# Altium PCB LEDFLX.PcbDoc (part 1 of 2)
Units mil, origin at the board's own origin, x right, y up, seen from the top; angles counter-clockwise.
Board outline 11984.7 x 6871.18 mil, 2 copper layers (Top Layer, Bottom Layer); 47 components, 41 nets, 211 pads, 221 vias.
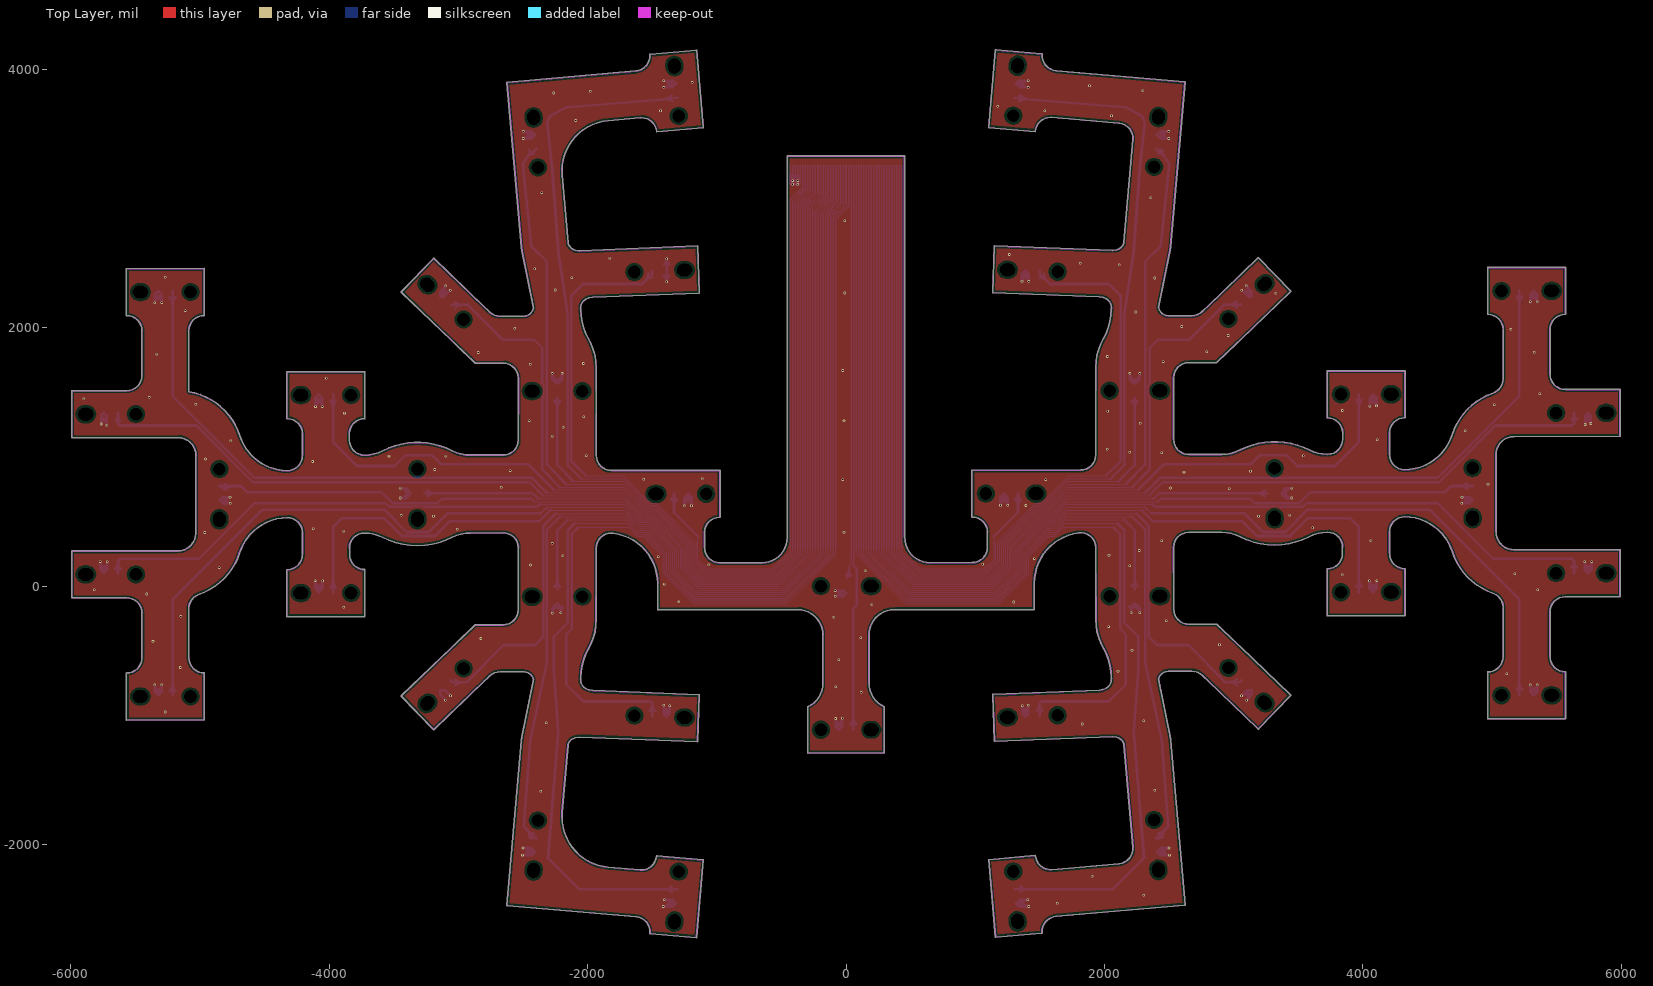
[diagram p0: Top Layer view]
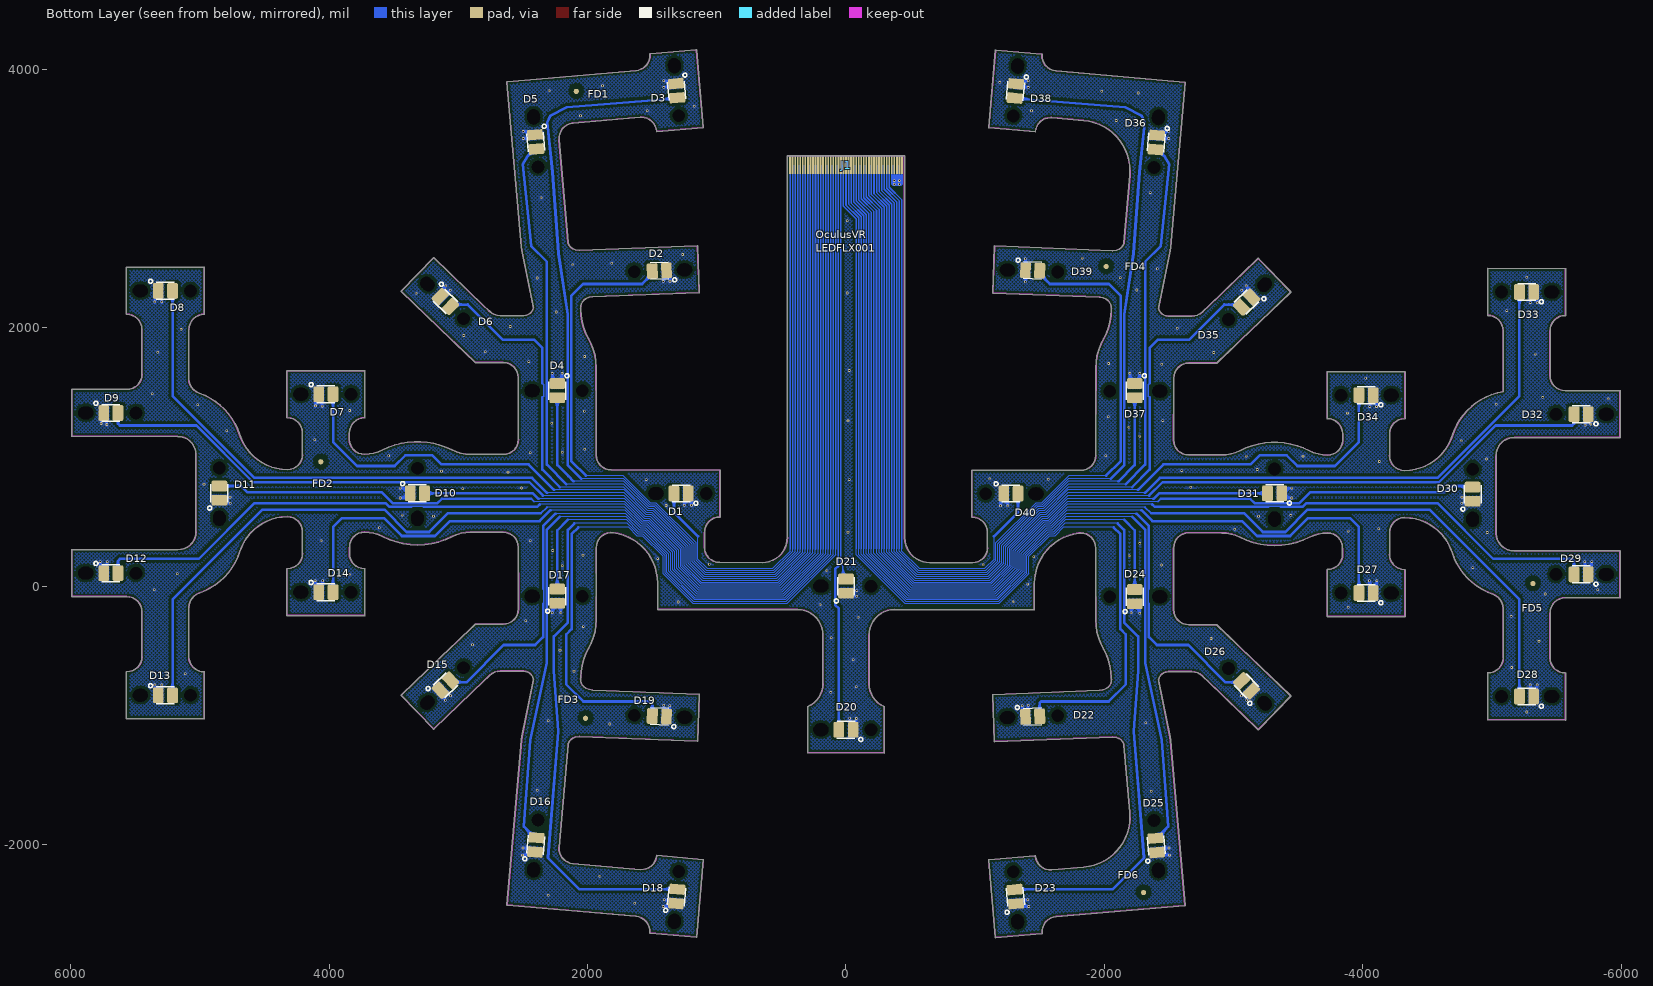
[diagram p1: Bottom Layer view, seen from below]

## Layer stack, top to bottom
Top Layer: signal copper 1.4
Dielectric: dielectric 12.6, FR-4, Dk 4.8
Bottom Layer: signal copper 1.4

## Board outline
1917 vertices, not listed, extent -5992.35,-2719.92 5992.35,4151.26

## Design rules (kind name [scope] priority, off if disabled: settings)
AssemblyTestpoint [All] p1: testpointundercomponent=TRUE minsize=30 maxsize=100 preferedsize=60 minholesize=0 maxholesize=40 preferedholesize=32 testpointgrid=1 usegrid=TRUE gridtolerance=0.01 allowsidetop=TRUE allowsidebottom=TRUE
Clearance Fiducial [HasFootprint('FIDUCIAL')] p1: gap=40
Clearance PolyToBoardOutline [InPolygon vs (OnLayer('Keep-Out Layer'))] p2: gap=15
Clearance PolyToPoly [InPolygon vs InPolygon] p3: gap=20
Clearance PolyToVia [InPolygon vs IsVia] p4: gap=20
Clearance PolyToTrace [InPolygon vs IsTrack] p5: gap=20
Clearance PolyToPad [InPolygon vs IsPad] p6: gap=20
Clearance PadToPad [IsPad vs IsPad] p7: gap=5
Clearance PadToVia [IsPad vs IsVia] p8: gap=4
Clearance [All] p9: gap=6
ComponentClearance [All] p1: gap=20 collisioncheckmode=3 verticalgap=10 showdistances=FALSE
FabricationTestpoint [All] p1: side=3 testpointundercomponent=TRUE minsize=30 maxsize=100 preferedsize=60 minholesize=0 maxholesize=40 preferedholesize=32 testpointgrid=1 allowsidetop=TRUE allowsidebottom=TRUE usegrid=TRUE gridtolerance=0.01
HoleSize [All] p1: absolutevalues=TRUE maxlimit=250 minlimit=10 maxpercent=80.000 minpercent=20.000
MinimumAnnularRing [All] p1: minimumring=5
MinimumSolderMaskSliver [All] p1: minsoldermaskwidth=4
PlaneClearance [All] p1: clearance=13
PlaneConnect [All] p1: planeconnectstyle=Direct reliefexpansion=10 reliefentries=4 reliefconductorwidth=10 reliefairgap=10
PolygonConnect [All] p1: connectstyle=Direct reliefconductorwidth=15 reliefentries=4 polygonreliefangle="90 Angle" airgapwidth=10
RoutingVias [All] p1: holewidth=10 width=32 viastyle="Through Hole" minholewidth=10 minwidth=20 maxholewidth=250 maxwidth=250
SilkToSilkClearance [All] p1: silktosilkclearance=0
SilkToSolderMaskClearance [IsPad] p1: minsilkscreentomaskgap=5 clearancetoexposedcopper=TRUE
SolderMaskExpansion [All] p1: expansion=4
Width [All] p1: maxlimit=50 minlimit=5 preferedwidth=10
19 further rules are at their usual default settings.

## Components (designator, comment, footprint, x,y, rotation, side; value= is the part's Value field where it differs from the comment)
D1 "LED" VISHAY_PLCC2_A 1276.42,716.73 r0 bottom locked
D2 "LED" VISHAY_PLCC2_A 1443.9,2441.14 r357.76 bottom locked
D3 "LED" VISHAY_PLCC2_A 1311.22,3834.88 r264.99 bottom locked
D4 "LED" VISHAY_PLCC2_A 2234.72,1512.95 r270 bottom locked
D5 "LED" VISHAY_PLCC2_A 2401.1,3438.19 r265.05 bottom locked
D6 "LED" VISHAY_PLCC2_A 3100.28,2203.46 r223.86 bottom locked
D7 "LED" VISHAY_PLCC2_A 4025.35,1484.92 r180 bottom locked
D8 "LED" VISHAY_PLCC2_A 5267.68,2285.35 r180 bottom locked
D9 "LED" VISHAY_PLCC2_A 5690.2,1340.35 r180 bottom locked
D10 "LED" VISHAY_PLCC2_A 3317.32,718.43 r180 bottom locked
D11 "LED" VISHAY_PLCC2_A 4850.2,719.72 r90 bottom locked
D12 "LED" VISHAY_PLCC2_A 5690.2,100.47 r180 bottom locked
D13 "LED" VISHAY_PLCC2_A 5267.68,-845.24 r180 bottom locked
D14 "LED" VISHAY_PLCC2_A 4025.35,-46.85 r180 bottom locked
D15 "LED" VISHAY_PLCC2_A 3100.28,-766.97 r136.14 bottom locked
D16 "LED" VISHAY_PLCC2_A 2401.1,-2002.83 r94.95 bottom locked
D17 "LED" VISHAY_PLCC2_A 2234.72,-77.91 r90 bottom locked
D18 "LED" VISHAY_PLCC2_A 1311.22,-2401.34 r95.01 bottom locked
D19 "LED" VISHAY_PLCC2_A 1443.9,-1007.4 r2.24 bottom locked
D20 "LED" VISHAY_PLCC2_A 0,-1111.77 r0 bottom locked
D21 "LED" VISHAY_PLCC2_A 0,0 r90 bottom locked
D22 "LED" VISHAY_PLCC2_A -1443.9,-1009.8 r177.76 bottom locked
D23 "LED" VISHAY_PLCC2_A -1311.22,-2403.54 r84.99 bottom locked
D24 "LED" VISHAY_PLCC2_A -2234.72,-81.61 r90 bottom locked
D25 "LED" VISHAY_PLCC2_A -2401.1,-2006.85 r85.05 bottom locked
D26 "LED" VISHAY_PLCC2_A -3100.28,-772.13 r46.14 bottom locked
D27 "LED" VISHAY_PLCC2_A -4025.35,-53.54 r0 bottom locked
D28 "LED" VISHAY_PLCC2_A -5267.68,-854.02 r0 bottom locked
D29 "LED" VISHAY_PLCC2_A -5690.2,90.98 r0 bottom locked
D30 "LED" VISHAY_PLCC2_A -4850.2,711.65 r90 bottom locked
D31 "LED" VISHAY_PLCC2_A -3317.32,718.43 r0 bottom locked
D32 "LED" VISHAY_PLCC2_A -5690.2,1330.87 r0 bottom locked
D33 "LED" VISHAY_PLCC2_A -5267.68,2276.57 r0 bottom locked
D34 "LED" VISHAY_PLCC2_A -4025.35,1478.19 r0 bottom locked
D35 "LED" VISHAY_PLCC2_A -3100.28,2198.31 r316.14 bottom locked
D36 "LED" VISHAY_PLCC2_A -2401.1,3434.17 r274.95 bottom locked
D37 "LED" VISHAY_PLCC2_A -2234.72,1512.95 r270 bottom locked
D38 "LED" VISHAY_PLCC2_A -1311.22,3832.68 r275.01 bottom locked
D39 "LED" VISHAY_PLCC2_A -1443.9,2443.9 r182.24 bottom locked
D40 "LED" VISHAY_PLCC2_A -1276.42,716.73 r180 bottom locked
FD1 "FIDUCIAL" FIDUCIAL 2087.7,3829.72 r180 bottom
FD2 "FIDUCIAL" FIDUCIAL 4064.96,962.15 r180 bottom
FD3 "FIDUCIAL" FIDUCIAL 2015.75,-1022.64 r180 bottom
FD4 "FIDUCIAL" FIDUCIAL -2013.78,2474.41 r180 bottom
FD5 "FIDUCIAL" FIDUCIAL -5316.93,19.69 r180 bottom
FD6 "FIDUCIAL" FIDUCIAL -2303.15,-2372.05 r180 bottom
J1 "62684-FPC" FCI_62684-FLEX_SIDE -0.08,3258.66 r180 bottom locked

## Footprints (in the part's own frame and the unit in brackets; to place one, negate y for a bottom-side part, rotate by r counter-clockwise, add the part's x,y. Pads: shape width x height; smd on the part's side, far side on the other; paste and mask are expansions set on the pad)
FCI_62684-FLEX_SIDE [mm]
  rect 0.35x3.5 smd paste+0 mask+0: 1(-11,0) 2(-10.5,0) 3(-10,0) 4(-9.5,0) 5(-9,0) 6(-8.5,0) 7(-8,0) 8(-7.5,0) 9(-7,0) 10(-6.5,0) 11(-6,0) 12(-5.5,0) 13(-5,0) 14(-4.5,0) 15(-4,0) 16(-3.5,0) 17(-3,0) 18(-2.5,0) 19(-2,0) 20(-1.5,0) 21(-1,0) 22(-0.5,0) 23(0,0) 24(0.5,0) 25(1,0) 26(1.5,0) 27(2,0) 28(2.5,0) 29(3,0) 30(3.5,0) 31(4,0) 32(4.5,0) 33(5,0) 34(5.5,0) 35(6,0) 36(6.5,0) 37(7,0) 38(7.5,0) 39(8,0) 40(8.5,0) 41(9,0) 42(9.5,0) 43(10,0) 44(10.5,0) 45(11,0)
FIDUCIAL [mil]
  round 40 smd paste-20 mask+20: 1(0,0)
  body extent -40,-40 40,40
VISHAY_PLCC2_A [mm]
  rrect30% 2.108x3.108 smd mask-0.254: 1(-1.4,0) 2(1.4,0)
  silkscreen extent -3.32,-1.65 1.78,2.31

## Part data
J1: library part FCI_62684-FLEX

## Free pads (board coordinates)
  round 0 hole 98.43 slot 118.11 at 0 deg: 1(-5884.45,90.83) 1(-5884.45,1330.72) 1(-5461.93,-854.16) 1(-5461.93,2276.42) 1(-4219.6,-53.72) 1(-4219.6,1478.05) 1(-2428.97,-81.78) 1(-2428.97,1509.08) 1(-1470.67,714.45) 1(194.24,-1111.61) 1(194.24,0.16) 1(1470.67,716.9) 1(2428.97,-77.74) 1(2428.97,1513.13) 1(4219.59,-46.7) 1(4219.59,1485.07) 1(5461.93,-845.07) 1(5461.93,2285.51) 1(5884.45,100.62) 1(5884.45,1340.51)
  round 0 hole 98.43: 1(-5495.96,91.15) 1(-5495.96,1331.04) 1(-5073.44,-853.84) 1(-5073.44,2276.74) 1(-4850.21,905.78) 1(-3831.1,-53.4) 1(-3831.1,1478.37) 1(-3317.32,907.06) 1(-2960.33,-637.4) 1(-2960.33,2063.82) 1(-2384.17,-1813.42) 1(-2384.17,3240.79) 1(-2040.48,-81.46) 1(-2040.48,1509.41) 1(-1637.98,-1002.38) 1(-1637.98,2431) 1(-1294.28,-2210.11) 1(-1294.28,3639.3) 1(-1082.18,714.77) 1(-194.25,-1111.93) 1(-194.25,-0.16) 1(1082.18,716.57) 1(1294.27,-2207.95) 1(1294.27,3641.45) 1(1637.98,-999.66) 1(1637.98,2433.73) 1(2040.48,-78.06) 1(2040.48,1512.8) 1(2384.17,-1809.45) 1(2384.17,3244.76) 1(2960.32,-632.47) 1(2960.32,2068.74) 1(3317.32,912.58) 1(3831.1,-47.02) 1(3831.1,1484.75) 1(4850.21,913.86) 1(5073.43,-845.4) 1(5073.43,2285.19) 1(5495.96,100.3) 1(5495.96,1340.19)
  round 0 hole 98.43 slot 118.11 at 90 deg: 1(-4850.21,517.49) 1(-3317.32,518.76) 1(3317.32,524.29) 1(4850.21,525.56)
  round 0 hole 98.43 slot 118.11 at 46.14 deg: 1(-3240.25,-906.88)
  round 0 hole 98.43 slot 118.11 at 136.14 deg: 1(-3240.25,2332.83) 1(3240.25,-901.48)
  round 0 hole 98.43 slot 118.11 at 85.05 deg: 1(-2418.05,-2200.26) 1(2418.05,3631.6)
  round 0 hole 98.43 slot 118.11 at 94.95 deg: 1(-2418.05,3627.58) 1(2418.05,-2196.24)
  round 0 hole 98.43 slot 118.11 at 84.99 deg: 1(-1328.16,-2596.95) 1(1328.16,4028.29)
  round 0 hole 98.43 slot 118.11 at 95.01 deg: 1(-1328.16,4026.08) 1(1328.16,-2594.74)
  round 0 hole 98.43 slot 118.11 at 177.76 deg: 1(-1249.79,-1017.23) 1(1249.79,2448.58)
  round 0 hole 98.43 slot 118.11 at 2.24 deg: 1(-1249.79,2446.5) 1(1249.79,-1015.15)
  round 0 hole 98.43 slot 118.11 at 43.86 deg: 1(3240.25,2338.22)

## Via types
v1: diameter 20, hole 10, Top Layer to Bottom Layer, 221 vias

## Nets (pads, with @x,y where several pads share a name; then routed paths per layer and width w, separated by ;. In a path a pad name is that pad's centre, name@x,y a point inside that pad or via, vN(x,y) a via of type N, cw(c..) or ccw(c..) an arc to the next point about the centre after c; other vN are vias at no path point)
LED_0: D1.2 J1.1 | length 4614.2
  Bottom Layer w8: 432.99,287.4 432.99,270.75 570.87,132.87 1071.85,132.87 1145.67,206.69 1145.67,384.84
  Bottom Layer w12: 432.99,287.4 J1.1@432.99,3258.66
  Bottom Layer w20: 1145.67,384.84 1331.54,570.71 D1.2@1331.54,716.73 ; 1331.54,621.01 cw(c1407.57,621.01) 1353.81,674.78 ccw(c1407.57,621.01) 1331.54,621.01 ; 1331.54,621.01 ccw(c1255.5,621.01) 1309.26,674.78 cw(c1255.5,621.01) 1331.54,621.01
LED_1: D2.2 J1.2 | length 7433.1
  Bottom Layer w8: 413.31,287.4 413.31,269.22 564.65,117.87 1078.06,117.87 1160.67,200.48 1160.67,335.27 1468.08,642.68 1509.8,642.68 1722.44,855.31 2013.78,855.31
  Bottom Layer w12: 413.31,287.4 J1.2@413.31,3258.66
  Bottom Layer w20: D2.2@1498.97,2438.99 1498.97,2417.37 1577.76,2338.58 2035.43,2338.58 2125,2249.02 2125,966.54 2013.78,855.31 ; D2.2@1498.2,2387.82 cw(c1498.2,2314.64) 1549.95,2366.39 ccw(c1498.2,2314.64) D2.2@1498.2,2387.82 ; D2.2@1529.7,2419.32 ccw(c1608.59,2419.32) 1552.81,2363.53 cw(c1608.59,2419.32) D2.2@1529.7,2419.32
LED_2: D3.2 J1.3 | length 9163.9
  Bottom Layer w8: 393.62,287.4 393.62,267.69 558.44,102.87 1084.28,102.87 1175.67,194.27 1175.67,329.06 1474.29,627.68 1516.02,627.68 1721.02,832.68 2050.2,832.68
  Bottom Layer w12: 393.62,287.4 J1.3@393.62,3258.66
  Bottom Layer w20: D3.2@1306.41,3779.97 1439.96,3765.75 2162.4,3706.69 2289.37,3639.76 2311.02,3588.58 2271.65,3205.71 2225.39,2575.79 2152.56,2101.38 2152.56,935.04 2050.2,832.68 ; D3.2@1339.52,3761.53 cw(c1371.34,3722.13) 1376.7,3772.49 ; D3.2@1342.74,3791.76 ccw(c1384.09,3825.15) 1378.46,3772.3 ; D3.2@1345.8,3753.75 cw(c1392.78,3695.57) 1400.71,3769.93 ; D3.2@1350.52,3798.04 ccw(c1410.66,3846.6) 1402.47,3769.74
LED_3: D4.2 J1.4 | length 6117.2
  Bottom Layer w8: 373.94,287.4 373.94,266.16 552.23,87.87 1090.49,87.87 1190.67,188.05 1190.67,322.84 1480.5,612.68 1522.23,612.68 1720.98,811.43 2108.67,811.43
  Bottom Layer w12: 373.94,287.4 J1.4@373.94,3258.66
  Bottom Layer w20: 2108.67,811.43 2149.09,851.85 2234.72,937.48 D4.2@2234.72,1457.83 ; 2234.72,1381.8 cw(c2310.76,1381.8) 2257,1435.56 ccw(c2310.76,1381.8) 2234.72,1381.8 ; 2234.72,1381.8 ccw(c2158.69,1381.8) 2212.45,1435.56 cw(c2158.69,1381.8) 2234.72,1381.8
LED_4: D5.2 J1.5 | length 8268.1
  Bottom Layer w8: 354.25,287.4 354.25,264.64 546.01,72.87 1096.7,72.87 1205.67,181.84 1205.67,316.63 1486.72,597.68 1528.44,597.68 1719.15,788.39 2164.37,788.39
  Bottom Layer w12: 354.25,287.4 J1.5@354.25,3258.66
  Bottom Layer w20: 2164.37,788.39 2315.94,939.96 2315.94,2510.83 2437.01,2631.89 2502.95,3266.73 2466.54,3324.8 D5.2@2396.35,3383.28 ; D5.2@2418.81,3350.21 cw(c2422.23,3312.73) 2446.32,3341.65 ccw(c2422.23,3312.73) D5.2@2418.81,3350.21 ; D5.2@2427.35,3380.04 ccw(c2464.05,3375.07) 2440.34,3346.62 cw(c2464.05,3375.07) D5.2@2427.35,3380.04 ; D5.2@2447.17,3377.36 ccw(c2506.33,3369.35) 2468.12,3323.48 cw(c2506.33,3369.35) D5.2@2447.17,3377.36
LED_5: D6.2 J1.6 | length 7559.7
  Bottom Layer w8: 334.57,287.4 334.57,263.11 539.8,57.87 1102.92,57.87 1220.67,175.63 1220.67,310.42 1492.93,582.68 1534.66,582.68 1718.71,766.73 2215.55,766.73
  Bottom Layer w10: 2350.39,1460.63 2339.57,1471.46 2339.57,1558.07 2350.39,1568.9
  Bottom Layer w12: 334.57,287.4 J1.6@334.57,3258.66
  Bottom Layer w20: 2215.55,766.73 2350.39,901.57 2350.39,1460.63 ; 2350.39,1568.9 2350.39,1842.52 2416.34,1908.46 2657.48,1908.46 2929.13,2180.12 D6.2@3056.6,2178.07 ; 2967.85,2179.5 ccw(c2969.14,2259.76) 3024.98,2202.09 cw(c2969.14,2259.76) 2967.85,2179.5 ; 2973.84,2179.4 cw(c2972.69,2107.61) 3024.27,2157.56 ccw(c2972.69,2107.61) 2973.84,2179.4
LED_6: D7.2 J1.7 | length 7942.8
  Bottom Layer w8: 314.88,287.4 314.88,261.58 533.59,42.87 1109.13,42.87 1235.67,169.41 1235.67,304.2 1499.14,567.68 1540.87,567.68 1718.27,745.08 2259.84,745.08
  Bottom Layer w12: 314.88,287.4 J1.7@314.88,3258.66
  Bottom Layer w20: 2259.84,745.08 2456.69,941.93 3130.91,941.93 3201.77,1012.8 3411.42,1012.8 3494.09,930.12 3784.45,930.12 3970.24,1115.91 D7.2@3970.24,1484.92 ; 3970.24,1389.2 cw(c4046.27,1389.2) 3992.51,1442.97 ccw(c4046.27,1389.2) 3970.24,1389.2 ; 3970.24,1389.2 ccw(c3894.2,1389.2) 3947.97,1442.97 cw(c3894.2,1389.2) 3970.24,1389.2
LED_7: D8.2 J1.8 | length 9741.3
  Bottom Layer w8: 295.2,287.4 295.2,260.05 527.37,27.87 1115.34,27.87 1250.67,163.2 1250.67,297.99 1505.36,552.68 1547.08,552.68 1716.85,722.44 2312.99,722.44
  Bottom Layer w12: 295.2,287.4 J1.8@295.2,3258.66
  Bottom Layer w20: 2312.99,722.44 2429.13,838.58 4578.74,838.58 5212.56,1472.4 D8.2@5212.56,2285.35 ; 5212.56,2189.63 cw(c5288.6,2189.63) 5234.83,2243.4 ccw(c5288.6,2189.63) 5212.56,2189.63 ; 5212.56,2189.63 ccw(c5136.52,2189.63) 5190.29,2243.4 cw(c5136.52,2189.63) 5212.56,2189.63
LED_8: D9.2 J1.9 | length 9317
  Bottom Layer w8: 275.51,287.4 275.51,258.52 521.16,12.87 1121.56,12.87 1265.67,156.99 1265.67,291.78 1511.57,537.68 1553.3,537.68 1715.42,699.8 2346.46,699.8
  Bottom Layer w12: 275.51,287.4 J1.9@275.51,3258.66
  Bottom Layer w20: 2346.46,699.8 2450.79,804.13 4589.57,804.13 5028.54,1243.11 5621.06,1243.11 5635.08,1257.13 ; D9.2@5635.08,1340.35 5635.08,1257.13 ; 5635.08,1257.13 cw(c5683.42,1257.13) 5654.15,1295.6 ccw(c5683.42,1257.13) 5635.08,1257.13 ; 5635.08,1257.13 ccw(c5586.73,1257.13) 5616.01,1295.6 cw(c5586.73,1257.13) 5635.08,1257.13
LED_9: D10.2 J1.10 | length 6731.7
  Bottom Layer w8: 255.83,287.4 255.83,256.99 514.95,-2.13 1127.77,-2.13 1280.67,150.77 1280.67,285.56 1517.78,522.68 1559.51,522.68 1712.03,675.2 2379.92,675.2
  Bottom Layer w12: 255.83,287.4 J1.10@255.83,3258.66
  Bottom Layer w20: 2379.92,675.2 2423.15,718.43 D10.2@3262.2,718.43 ; 3186.17,718.43 cw(c3186.17,642.39) 3239.93,696.15 ccw(c3186.17,642.39) 3186.17,718.43 ; 3186.17,718.43 ccw(c3186.17,794.46) 3239.93,740.7 cw(c3186.17,794.46) 3186.17,718.43
LED_10: D11.2 J1.11 | length 8405.9
  Bottom Layer w8: 236.14,287.4 236.14,255.47 508.73,-17.13 1133.98,-17.13 1295.67,144.56 1295.67,279.35 1524,507.68 1565.72,507.68 1711.59,653.54 2414.37,653.54
  Bottom Layer w12: 236.14,287.4 J1.11@236.14,3258.66
  Bottom Layer w15: 2414.37,653.54 2437.01,676.18
  Bottom Layer w20: 2437.01,676.18 3128.94,676.18 3164.93,640.19 3507.32,640.19 3592.52,725.39 4633.86,725.39 4683.31,774.84 D11.2@4850.2,774.84 ; 4754.47,774.84 cw(c4754.47,698.8) 4808.24,752.57 ccw(c4754.47,698.8) 4754.47,774.84 ; 4754.47,774.84 ccw(c4754.47,850.88) 4808.24,797.11 cw(c4754.47,850.88) 4754.47,774.84
LED_11: D12.2 J1.12 | length 9430.3
  Bottom Layer w8: 216.46,287.4 216.46,253.94 502.52,-32.13 1140.2,-32.13 1310.67,138.35 1310.67,273.14 1530.21,492.68 1571.94,492.68 1711.15,631.89 2371.06,631.89
  Bottom Layer w10: 3267.72,613.19 3271.65,617.13 3363.19,617.13 3367.13,613.19
  Bottom Layer w12: 216.46,287.4 J1.12@216.46,3258.66
  Bottom Layer w20: 2371.06,631.89 2389.76,613.19 3267.72,613.19 ; 3367.13,613.19 3534.45,613.19 3563.98,642.72 4577.76,642.72 5009.84,210.63 5619.09,210.63 5635.08,194.65 ; D12.2@5635.08,100.47 5635.08,194.65 ; 5635.08,194.64 cw(c5562.76,194.64) 5613.14,142.75 ccw(c5562.76,194.64) 5635.08,194.64 ; 5635.08,194.64 ccw(c5707.4,194.64) 5657.02,142.75 cw(c5707.4,194.64) 5635.08,194.64
LED_12: D13.2 J1.13 | length 9918
  Bottom Layer w8: 196.77,287.4 196.77,252.41 496.31,-47.13 1146.41,-47.13 1325.67,132.13 1325.67,266.93 1536.42,477.68 1578.15,477.68 1712.68,612.2 2313.98,612.2
  Bottom Layer w12: 196.77,287.4 J1.13@196.77,3258.66
  Bottom Layer w15: 2313.98,612.2 2363.19,562.99
  Bottom Layer w20: 2363.19,562.99 3082.68,562.99 3226.38,419.29 3401.57,419.29 3573.82,591.54 4517.72,591.54 5212.56,-103.31 D13.2@5212.56,-845.24 ; 5212.56,-749.51 cw(c5136.52,-749.51) 5190.29,-803.28 ccw(c5136.52,-749.51) 5212.56,-749.51 ; 5212.56,-749.51 ccw(c5288.6,-749.51) 5234.83,-803.28 cw(c5288.6,-749.51) 5212.56,-749.51
LED_13: D14.2 J1.14 | length 8191.8
  Bottom Layer w8: 177.09,287.4 177.09,250.88 490.09,-62.13 1152.62,-62.13 1340.67,125.92 1340.67,260.71 1542.63,462.68 1584.36,462.68 1710.27,588.58 2286.42,588.58
  Bottom Layer w12: 177.09,287.4 J1.14@177.09,3258.66
  Bottom Layer w20: 2286.42,588.58 2372.05,502.95 3066.93,502.95 3182.09,387.8 3437.99,387.8 3576.77,526.57 3901.57,526.57 3970.24,457.91 D14.2@3970.24,-46.85 ; 3970.24,48.87 cw(c3894.2,48.87) 3947.97,-4.89 ccw(c3894.2,48.87) 3970.24,48.87 ; 3970.24,48.87 ccw(c4046.27,48.87) 3992.51,-4.89 cw(c4046.27,48.87) 3970.24,48.87
LED_14: D15.2 J1.15 | length 7683.8
  Bottom Layer w8: 157.4,287.4 157.4,249.35 483.88,-77.13 1158.84,-77.13 1355.67,119.71 1355.67,254.5 1548.85,447.68 1590.57,447.68 1703.71,560.81 2248.25,560.81
  Bottom Layer w10: 2343.5,-134.84 2339.36,-130.7 2339.36,-26.78 2344.49,-21.65
  Bottom Layer w12: 157.4,287.4 J1.15@157.4,3258.66
  Bottom Layer w20: 2248.25,560.81 2344.49,464.57 2344.49,-21.65 ; 2343.5,-134.84 2344.49,-394.69 2405.51,-455.71 2649.61,-455.71 2937.99,-744.09 3045.22,-744.09 D15.2@3060.53,-728.78 ; 2968.14,-744.09 ccw(c2968.14,-664.22) 3024.62,-720.7 cw(c2968.14,-664.22) 2968.14,-744.09 ; 2973.57,-744.09 cw(c2973.57,-816.3) 3024.62,-765.24 ccw(c2973.57,-816.3) 2973.57,-744.09
LED_15: D16.2 J1.16 | length 8528.8
  Bottom Layer w8: 137.72,287.4 137.72,247.83 477.67,-92.13 1165.05,-92.13 1370.67,113.49 1370.67,248.29 1555.06,432.68 1596.79,432.68 1701.6,537.49 2215.47,537.49
  Bottom Layer w12: 137.72,287.4 J1.16@137.72,3258.66
  Bottom Layer w20: 2215.47,537.49 2315.94,437.01 2315.94,-595.47 2442.91,-1191.93 2494.09,-1860.24 2402.54,-1951.8 2400.22,-1951.8 D16.2@2396.35,-1947.92 ; D16.2@2418.34,-1954.39 ccw(c2403.21,-1902.49) 2455.42,-1916.48 ; D16.2@2415.96,-1914.73 ccw(c2415.96,-1857.64) 2456.32,-1898.01 cw(c2415.96,-1857.64) D16.2@2415.96,-1914.73 ; D16.2@2427.45,-1946.22 cw(c2474.16,-1946.22) 2441.13,-1913.2 ccw(c2474.16,-1946.22) D16.2@2427.45,-1946.22 ; D16.2@2447.45,-1946.22 cw(c2542.45,-1946.22) 2475.28,-1879.05 ccw(c2542.45,-1946.22) D16.2@2447.45,-1946.22
LED_16: D17.2 J1.17 | length 6338.5
  Bottom Layer w8: 118.03,287.4 118.03,246.3 471.45,-107.13 1171.26,-107.13 1385.67,107.28 1385.67,242.07 1561.27,417.68 1603,417.68 1697.91,512.58 2154.74,512.58
  Bottom Layer w12: 118.03,287.4 J1.17@118.03,3258.66
  Bottom Layer w20: 2154.74,512.58 2234.72,432.6 D17.2@2234.72,-22.8 ; 2234.72,53.24 cw(c2158.69,53.24) 2212.45,-0.52 ccw(c2158.69,53.24) 2234.72,53.24 ; 2234.72,53.24 ccw(c2310.76,53.24) 2257,-0.52 cw(c2310.76,53.24) 2234.72,53.24
LED_17: D18.2 J1.18 | length 9500.4
  Bottom Layer w8: 98.35,287.4 98.35,244.77 465.24,-122.13 1177.47,-122.13 1400.67,101.07 1400.67,235.86 1567.49,402.68 1609.21,402.68 1691.94,485.4 2103.18,485.4
  Bottom Layer w12: 98.35,287.4 J1.18@98.35,3258.66
  Bottom Layer w20: D18.2@1306.41,-2346.43 2064,-2346.43 2306.59,-2103.84 2226.38,-1122.05 2261.81,-655.51 2261.81,-389.76 2153.54,-281.5 2153.54,435.04 2103.18,485.4 ; D18.2@1348.29,-2366.98 cw(c1397.9,-2416.6) 1397.9,-2346.43 ccw(c1397.9,-2416.6) D18.2@1348.29,-2366.98 ; D18.2@1348.29,-2322.44 ccw(c1406.21,-2264.52) 1406.21,-2346.43 cw(c1406.21,-2264.52) D18.2@1348.29,-2322.44
LED_18: D19.2 J1.19 | length 7810
  Bottom Layer w8: 78.66,287.4 78.66,243.24 459.03,-137.13 1183.69,-137.13 1415.67,94.86 1415.67,229.65 1573.7,387.68 1615.43,387.68 1682.47,454.72 2070.87,454.72
  Bottom Layer w12: 78.66,287.4 J1.19@78.66,3258.66
  Bottom Layer w20: D19.2@1498.97,-1005.25 1498.97,-903.59 1509.84,-892.72 2033.46,-892.72 2165.35,-760.83 2165.35,-374.02 2123.03,-331.69 2123.03,402.56 2070.87,454.72 ; D19.2@1475.93,-963.31 ccw(c1420.31,-907.68) 1498.97,-907.68 cw(c1420.31,-907.68) D19.2@1475.93,-963.31 ; 1498.97,-911.4 ccw(c1572.38,-911.4) 1520.48,-963.31 cw(c1572.38,-911.4) 1498.97,-911.4
LED_19: D20.2 J1.20 | length 4631.4
  Bottom Layer w12: 58.98,157.56 J1.20@58.98,3258.66
  Bottom Layer w20: D20.2@55.12,-1111.77 55.12,-174.21 83.66,-145.67 83.66,132.87 58.98,157.56 ; 55.12,-1016.05 cw(c-20.92,-1016.05) 32.85,-1069.82 ccw(c-20.92,-1016.05) 55.12,-1016.05 ; 55.12,-1016.05 ccw(c131.16,-1016.05) 77.39,-1069.82 cw(c131.16,-1016.05) 55.12,-1016.05
LED_20: D21.2 J1.21 | length 3481.2
  Bottom Layer w12: D21.2@-5.41,80.22 ccw(c-80.27,155.07) 25.59,155.07 ; D21.2@0,55.12 25.59,80.71 25.59,155.29 39.29,168.99 J1.21@39.29,3258.66 ; D21.2@3.07,71.73 ccw(c-51.3,126.1) 25.59,126.1 ; D21.2@11.56,63.25 ccw(c-22.33,97.13) 25.59,97.13 ; 25.59,97.59 ccw(c62.15,97.59) D21.2@36.3,71.73 ; 25.59,126.56 ccw(c91.12,126.56) D21.2@44.78,80.22
LED_21: D22.2 J1.22 | length 7731.3
  Bottom Layer w8: -2070.87,454.72 -1682.47,454.72 -1615.43,387.68 -1573.7,387.68 -1415.67,229.65 -1415.67,94.86 -1183.69,-137.13 -459.03,-137.13 -78.66,243.24 -78.66,291.34
  Bottom Layer w12: -78.66,291.34 -78.66,2842.48 19.61,2940.75 J1.22@19.61,3258.66
  Bottom Layer w20: -2070.87,454.72 -2123.03,402.56 -2123.03,-331.69 -2165.35,-374.02 -2165.35,-760.83 -2033.46,-892.72 -1509.84,-892.72 -1498.97,-903.59 D22.2@-1498.97,-1005.25 ; D22.2@-1520.48,-965.71 ccw(c-1572.38,-913.8) -1498.97,-913.8 ; -1498.97,-910.08 ccw(c-1420.31,-910.08) D22.2@-1475.93,-965.71
LED_22: D23.2 J1.23 | length 9421.7
  Bottom Layer w8: -2103.18,485.4 -1691.94,485.4 -1609.21,402.68 -1567.49,402.68 -1400.67,235.86 -1400.67,101.07 -1177.47,-122.13 -465.24,-122.13 -98.35,244.77 -98.35,291.34
  Bottom Layer w12: -98.35,291.34 -98.35,2850.64 -0.08,2948.91 J1.23@-0.08,3258.66
  Bottom Layer w20: -2103.18,485.4 -2153.54,435.04 -2153.54,-281.5 -2261.81,-389.76 -2261.81,-655.51 -2226.38,-1122.05 -2306.59,-2103.84 -2064,-2346.43 D23.2@-1306.41,-2346.43 ; -1403.23,-2346.43 cw(c-1403.23,-2424.13) D23.2@-1348.29,-2369.19 ; -1400.88,-2346.43 ccw(c-1400.88,-2272.05) D23.2@-1348.29,-2324.65
LED_23: D24.2 J1.24 | length 6259.8
  Bottom Layer w8: -2154.74,512.58 -1697.91,512.58 -1603,417.68 -1561.27,417.68 -1385.67,242.07 -1385.67,107.28 -1171.26,-107.13 -471.45,-107.13 -118.03,246.3 -118.03,291.34
  Bottom Layer w12: -118.03,291.34 -118.03,2858.79 -19.76,2957.06 J1.24@-19.76,3258.66
  Bottom Layer w20: D24.2@-2257,-4.23 ccw(c-2310.76,49.54) -2234.72,49.54 ccw(c-2158.69,49.54) D24.2@-2212.45,-4.23 ; D24.2@-2234.72,-22.8 -2234.72,432.6 -2154.74,512.58
LED_24: D25.2 J1.25 | length 8365.5
  Bottom Layer w8: -2215.47,537.49 -1701.6,537.49 -1596.79,432.68 -1555.06,432.68 -1370.67,248.29 -1370.67,113.49 -1165.05,-92.13 -477.67,-92.13 -137.72,247.83 -137.72,291.34
  Bottom Layer w12: -137.72,291.34 -137.72,2866.94 -39.45,2965.21 J1.25@-39.45,3258.66
  Bottom Layer w20: -2478.12,-1876.21 cw(c-2552.14,-1950.24) D25.2@-2447.45,-1950.24 ; -2449.47,-1904.86 ccw(c-2415.96,-1871.35) D25.2@-2415.96,-1918.74 ; D25.2@-2443.97,-1910.36 cw(c-2483.86,-1950.24) D25.2@-2427.45,-1950.24 ; D25.2@-2396.35,-1947.92 -2400.22,-1951.8 -2402.54,-1951.8 -2494.09,-1860.24 -2442.91,-1191.93 -2315.94,-595.47 -2315.94,437.01 -2215.47,537.49
LED_25: D26.2 J1.26 | length 7605
  Bottom Layer w8: -2248.25,560.81 -1703.71,560.81 -1590.57,447.68 -1548.85,447.68 -1355.67,254.5 -1355.67,119.71 -1158.84,-77.13 -483.88,-77.13 -157.4,249.35 -157.4,291.34
  Bottom Layer w10: -2344.49,-21.65 -2339.36,-26.78 -2339.36,-130.7 -2343.5,-134.84
  Bottom Layer w12: -157.4,291.34 -157.4,2875.1 -59.13,2973.37 J1.26@-59.13,3258.66
  Bottom Layer w20: D26.2@-3060.53,-728.78 -3045.22,-744.09 -2937.99,-744.09 -2649.61,-455.71 -2405.51,-455.71 -2344.49,-394.69 -2343.5,-134.84 ; D26.2@-3025.62,-768.29 cw(c-2967.2,-826.72) -2967.2,-744.09 ; D26.2@-3025.62,-723.75 ccw(c-2976.51,-674.64) -2976.51,-744.09 ; -2344.49,-21.65 -2344.49,464.57 -2248.25,560.81
LED_26: D27.2 J1.27 | length 8113.1
  Bottom Layer w8: -2286.42,588.58 -1710.27,588.58 -1584.36,462.68 -1542.63,462.68 -1340.67,260.71 -1340.67,125.92 -1152.62,-62.13 -490.09,-62.13 -177.09,250.88 -177.09,291.34
  Bottom Layer w12: -177.09,291.34 -177.09,2883.25 -78.82,2981.52 J1.27@-78.82,3258.66
  Bottom Layer w20: D27.2@-3992.51,-11.59 ccw(c-4046.27,42.18) -3970.24,42.18 ccw(c-3894.2,42.18) D27.2@-3947.97,-11.59 ; D27.2@-3970.24,-46.85 -3970.24,457.91 -3901.57,526.57 -3576.77,526.57 -3437.99,387.8 -3182.09,387.8 -3066.93,502.95 -2372.05,502.95 -2286.42,588.58
LED_27: D28.2 J1.28 | length 9839.3
  Bottom Layer w8: -2313.98,612.2 -1712.68,612.2 -1578.15,477.68 -1536.42,477.68 -1325.67,266.93 -1325.67,132.13 -1146.41,-47.13 -496.31,-47.13 -196.77,252.41 -196.77,291.34
  Bottom Layer w12: -196.77,291.34 -196.77,2891.41 -98.5,2989.67 J1.28@-98.5,3258.66
  Bottom Layer w15: -2363.19,562.99 -2313.98,612.2
  Bottom Layer w20: D28.2@-5234.83,-812.06 ccw(c-5288.6,-758.29) -5212.56,-758.29 ccw(c-5136.52,-758.29) D28.2@-5190.29,-812.06 ; D28.2@-5212.56,-845.24 -5212.56,-103.31 -4517.72,591.54 -3573.82,591.54 -3401.57,419.29 -3226.38,419.29 -3082.68,562.99 -2363.19,562.99
LED_28: D29.2 J1.29 | length 9359
  Bottom Layer w8: -2371.06,631.89 -1711.15,631.89 -1571.94,492.68 -1530.21,492.68 -1310.67,273.14 -1310.67,138.35 -1140.2,-32.13 -502.52,-32.13 -216.46,253.94 -216.46,291.34
  Bottom Layer w10: -3367.13,613.19 -3363.19,617.13 -3271.65,617.13 -3267.72,613.19
  Bottom Layer w12: -216.46,291.34 -216.46,2899.56 -118.19,2997.83 J1.29@-118.19,3258.66
  Bottom Layer w20: D29.2@-5657.35,132.94 ccw(c-5711.12,186.71) -5635.08,186.71 ccw(c-5559.04,186.71) D29.2@-5612.81,132.94 ; D29.2@-5635.08,100.47 -5635.08,194.65 -5619.09,210.63 -5009.84,210.63 -4577.76,642.72 -3563.98,642.72 -3534.45,613.19 -3367.13,613.19 ; -3267.72,613.19 -2389.76,613.19 -2371.06,631.89
LED_29: D30.2 J1.30 | length 8370.6
  Bottom Layer w8: -2414.37,653.54 -1711.59,653.54 -1565.72,507.68 -1524,507.68 -1295.67,279.35 -1295.67,144.56 -1133.98,-17.13 -508.73,-17.13 -236.14,255.47 -236.14,291.34
  Bottom Layer w12: -236.14,291.34 -236.14,2907.71 -137.87,3005.98 J1.30@-137.87,3258.66
  Bottom Layer w15: -2437.01,676.18 -2414.37,653.54
  Bottom Layer w20: D30.2@-4850.2,774.84 -4683.31,774.84 -4633.86,725.39 -3592.52,725.39 -3507.32,640.19 -3164.93,640.19 -3128.94,676.18 -2437.01,676.18 ; D30.2@-4822.38,758.64 cw(c-4783.27,719.53) -4783.27,774.84 ; D30.2@-4808.24,744.5 cw(c-4734.99,671.25) -4734.99,774.84 ; D30.2@-4808.24,789.04 ccw(c-4773.96,823.32) -4773.96,774.84
LED_30: D31.2 J1.31 | length 6652.9
  Bottom Layer w8: -2379.92,675.2 -1712.03,675.2 -1559.51,522.68 -1517.78,522.68 -1280.67,285.56 -1280.67,150.77 -1127.77,-2.13 -514.95,-2.13 -255.83,256.99 -255.83,291.34
  Bottom Layer w12: -255.83,291.34 -255.83,2915.87 -157.56,3014.14 J1.31@-157.56,3258.66
  Bottom Layer w20: D31.2@-3262.2,718.43 -2423.15,718.43 -2379.92,675.2 ; D31.2@-3239.93,696.15 cw(c-3186.17,642.39) -3186.17,718.43 cw(c-3186.17,794.46) D31.2@-3239.93,740.7
LED_31: D32.2 J1.32 | length 9244.4
  Bottom Layer w8: -2346.46,699.8 -1715.42,699.8 -1553.3,537.68 -1511.57,537.68 -1265.67,291.78 -1265.67,156.99 -1121.56,12.87 -521.16,12.87 -275.51,258.52 -275.51,291.34
  Bottom Layer w12: -275.51,291.34 -275.51,2924.02 -177.24,3022.29 J1.32@-177.24,3258.66
  Bottom Layer w20: D32.2@-5650.61,1283.78 cw(c-5665.71,1257.13) -5635.08,1257.13 ; D32.2@-5635.08,1340.35 -5635.08,1257.13 ; D32.2@-5619.55,1283.78 ccw(c-5604.44,1257.13) -5635.08,1257.13 ; -2346.46,699.8 -2450.79,804.13 -4589.57,804.13 -5028.54,1243.11 -5621.06,1243.11 -5635.08,1257.13
LED_32: D33.2 J1.33 | length 9662.5
  Bottom Layer w8: -2312.99,722.44 -1716.85,722.44 -1547.08,552.68 -1505.36,552.68 -1250.67,297.99 -1250.67,163.2 -1115.34,27.87 -527.37,27.87 -295.2,260.05 -295.2,291.34
  Bottom Layer w12: -295.2,291.34 -295.2,2932.17 -196.93,3030.44 J1.33@-196.93,3258.66
  Bottom Layer w20: D33.2@-5234.83,2234.62 cw(c-5288.6,2180.85) -5212.56,2180.85 cw(c-5136.52,2180.85) D33.2@-5190.29,2234.62 ; D33.2@-5212.56,2285.35 -5212.56,1472.4 -4578.74,838.58 -2429.13,838.58 -2312.99,722.44
LED_33: D34.2 J1.34 | length 7864.1
  Bottom Layer w8: -2259.84,745.08 -1718.27,745.08 -1540.87,567.68 -1499.14,567.68 -1235.67,304.2 -1235.67,169.41 -1109.13,42.87 -533.59,42.87 -314.88,261.58 -314.88,291.34
  Bottom Layer w12: -314.88,291.34 -314.88,2940.33 -216.61,3038.6 J1.34@-216.61,3258.66
  Bottom Layer w20: D34.2@-3992.51,1436.23 cw(c-4046.27,1382.47) -3970.24,1382.47 cw(c-3894.2,1382.47) D34.2@-3947.97,1436.23 ; D34.2@-3970.24,1484.92 -3970.24,1115.91 -3784.45,930.12 -3494.09,930.12 -3411.42,1012.8 -3201.77,1012.8 -3130.91,941.93 -2456.69,941.93 -2259.84,745.08
LED_34: D35.2 J1.35 | length 7480.9
  Bottom Layer w8: -2215.55,766.73 -1718.71,766.73 -1534.66,582.68 -1492.93,582.68 -1220.67,310.42 -1220.67,175.63 -1102.92,57.87 -539.8,57.87 -334.57,263.11 -334.57,291.34
  Bottom Layer w10: -2350.39,1460.63 -2339.57,1471.46 -2339.57,1558.07 -2350.39,1568.9
  Bottom Layer w12: -334.57,291.34 -334.57,2948.48 -236.3,3046.75 J1.35@-236.3,3258.66
  Bottom Layer w20: D35.2@-3056.6,2178.07 -2929.13,2180.12 -2657.48,1908.46 -2416.34,1908.46 -2350.39,1842.52 -2350.39,1568.9 ; D35.2@-3024.98,2196.94 ccw(c-2981.39,2241.96) -2980.38,2179.29 ; D35.2@-3024.27,2152.4 cw(c-2960.04,2090.21) -2961.48,2179.6 ; -2350.39,1460.63 -2350.39,901.57 -2215.55,766.73
LED_35: D36.2 J1.36 | length 8148.6
  Bottom Layer w8: -2164.37,788.39 -1719.15,788.39 -1528.44,597.68 -1486.72,597.68 -1205.67,316.63 -1205.67,181.84 -1096.7,72.87 -546.01,72.87 -354.25,264.64 -354.25,291.34
  Bottom Layer w12: -354.25,291.34 -354.25,2956.64 -255.98,3054.9 J1.36@-255.98,3258.66
  Bottom Layer w20: -2467.68,3323.85 ccw(c-2504.55,3368.1) D36.2@-2447.28,3374.22 ; -2454.01,3335.23 cw(c-2423.18,3298.22) D36.2@-2418.81,3346.2 ; D36.2@-2396.35,3383.28 -2466.54,3324.8 -2502.95,3266.73 -2437.01,2631.89 -2315.94,2510.83 -2315.94,939.96 -2164.37,788.39
LED_36: D37.2 J1.37 | length 6038.5
  Bottom Layer w8: -2108.67,811.43 -1720.98,811.43 -1522.23,612.68 -1480.5,612.68 -1190.67,322.84 -1190.67,188.05 -1090.49,87.87 -552.23,87.87 -373.94,266.16 -373.94,291.34
  Bottom Layer w12: -373.94,291.34 -373.94,2964.79 -275.67,3063.06 J1.37@-275.67,3258.66
  Bottom Layer w20: D37.2@-2257,1435.56 cw(c-2310.76,1381.8) -2234.72,1381.8 cw(c-2158.69,1381.8) D37.2@-2212.45,1435.56 ; D37.2@-2234.72,1457.83 -2234.72,937.48 -2108.67,811.43
LED_37: D38.2 J1.38 | length 9123.1
  Bottom Layer w8: -2050.2,832.68 -1721.02,832.68 -1516.02,627.68 -1474.29,627.68 -1175.67,329.06 -1175.67,194.27 -1084.28,102.87 -558.44,102.87 -393.62,267.69 -393.62,291.34
  Bottom Layer w12: -393.62,291.34 -393.62,2972.94 -295.35,3071.21 J1.38@-295.35,3258.66
  Bottom Layer w20: -2050.2,832.68 -2152.56,935.04 -2152.56,2101.38 -2225.39,2575.79 -2271.65,3205.71 -2311.02,3588.58 -2289.37,3639.76 -2162.4,3706.69 -1439.96,3765.75 D38.2@-1306.41,3779.97 ; -1406.2,3769.34 cw(c-1397.49,3687.54) D38.2@-1345.8,3751.55 ; -1397.44,3770.28 ccw(c-1404.83,3839.69) D38.2@-1350.52,3795.84
LED_38: D39.2 J1.39 | length 7354.3
  Bottom Layer w8: -2013.78,855.31 -1722.44,855.31 -1509.8,642.68 -1468.08,642.68 -1160.67,335.27 -1160.67,200.48 -1078.06,117.87 -564.65,117.87 -413.31,269.22 -413.31,291.34
  Bottom Layer w12: -413.31,291.34 -413.31,2981.1 -315.04,3079.37 J1.39@-315.04,3258.66
  Bottom Layer w20: -2013.78,855.31 -2125,966.54 -2125,2249.02 -2035.43,2338.58 -1577.76,2338.58 -1498.97,2417.37 D39.2@-1498.97,2438.99 ; -1554.76,2361.58 ccw(c-1615.25,2422.07) D39.2@-1529.7,2422.07 ; -1545.25,2371.09 cw(c-1498.2,2324.05) D39.2@-1498.2,2390.58
LED_39: D40.2 J1.40 | length 4535.4
  Bottom Layer w8: -1145.67,384.84 -1145.67,206.69 -1071.85,132.87 -570.87,132.87 -432.99,270.75 -432.99,291.34
  Bottom Layer w12: -432.99,291.34 -432.99,2989.25 -334.72,3087.52 J1.40@-334.72,3258.66
  Bottom Layer w20: D40.2@-1353.81,674.78 cw(c-1407.57,621.01) -1331.54,621.01 cw(c-1255.5,621.01) D40.2@-1309.26,674.78 ; D40.2@-1331.54,716.73 -1331.54,570.71 -1145.67,384.84